# Altium PCB PCB2.PcbDoc
Units mm, origin at the board's own origin, x right, y up, seen from the top; angles counter-clockwise.
Board outline 40 x 40 mm, 2 copper layers (Top Layer, Bottom Layer), stack 1.571 mm thick; 8 components, 12 nets, 57 pads, 27 vias.
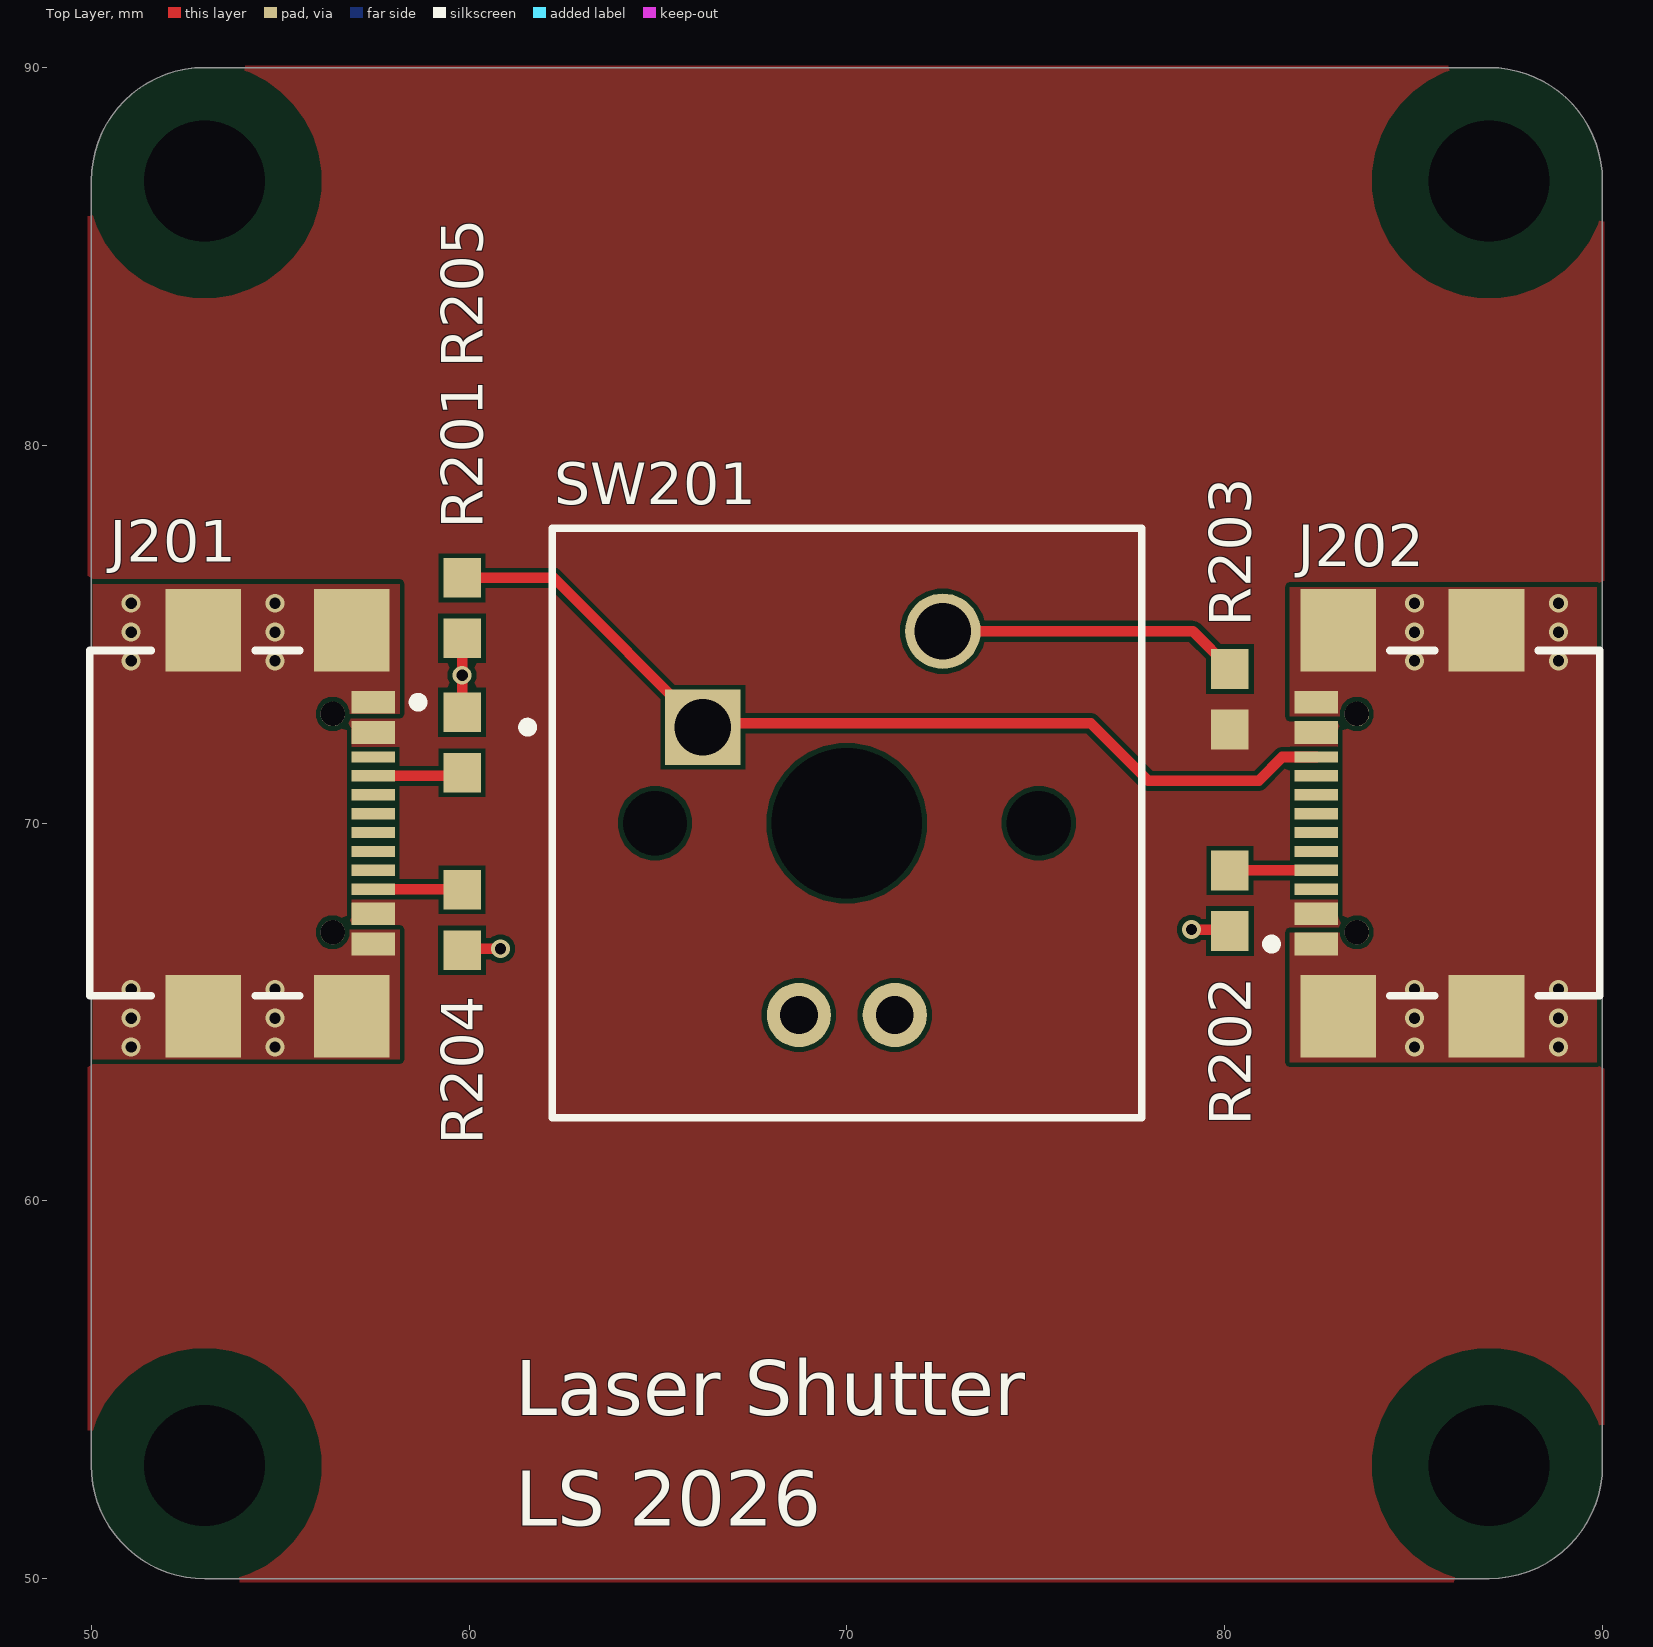
[diagram p0: Top Layer view]
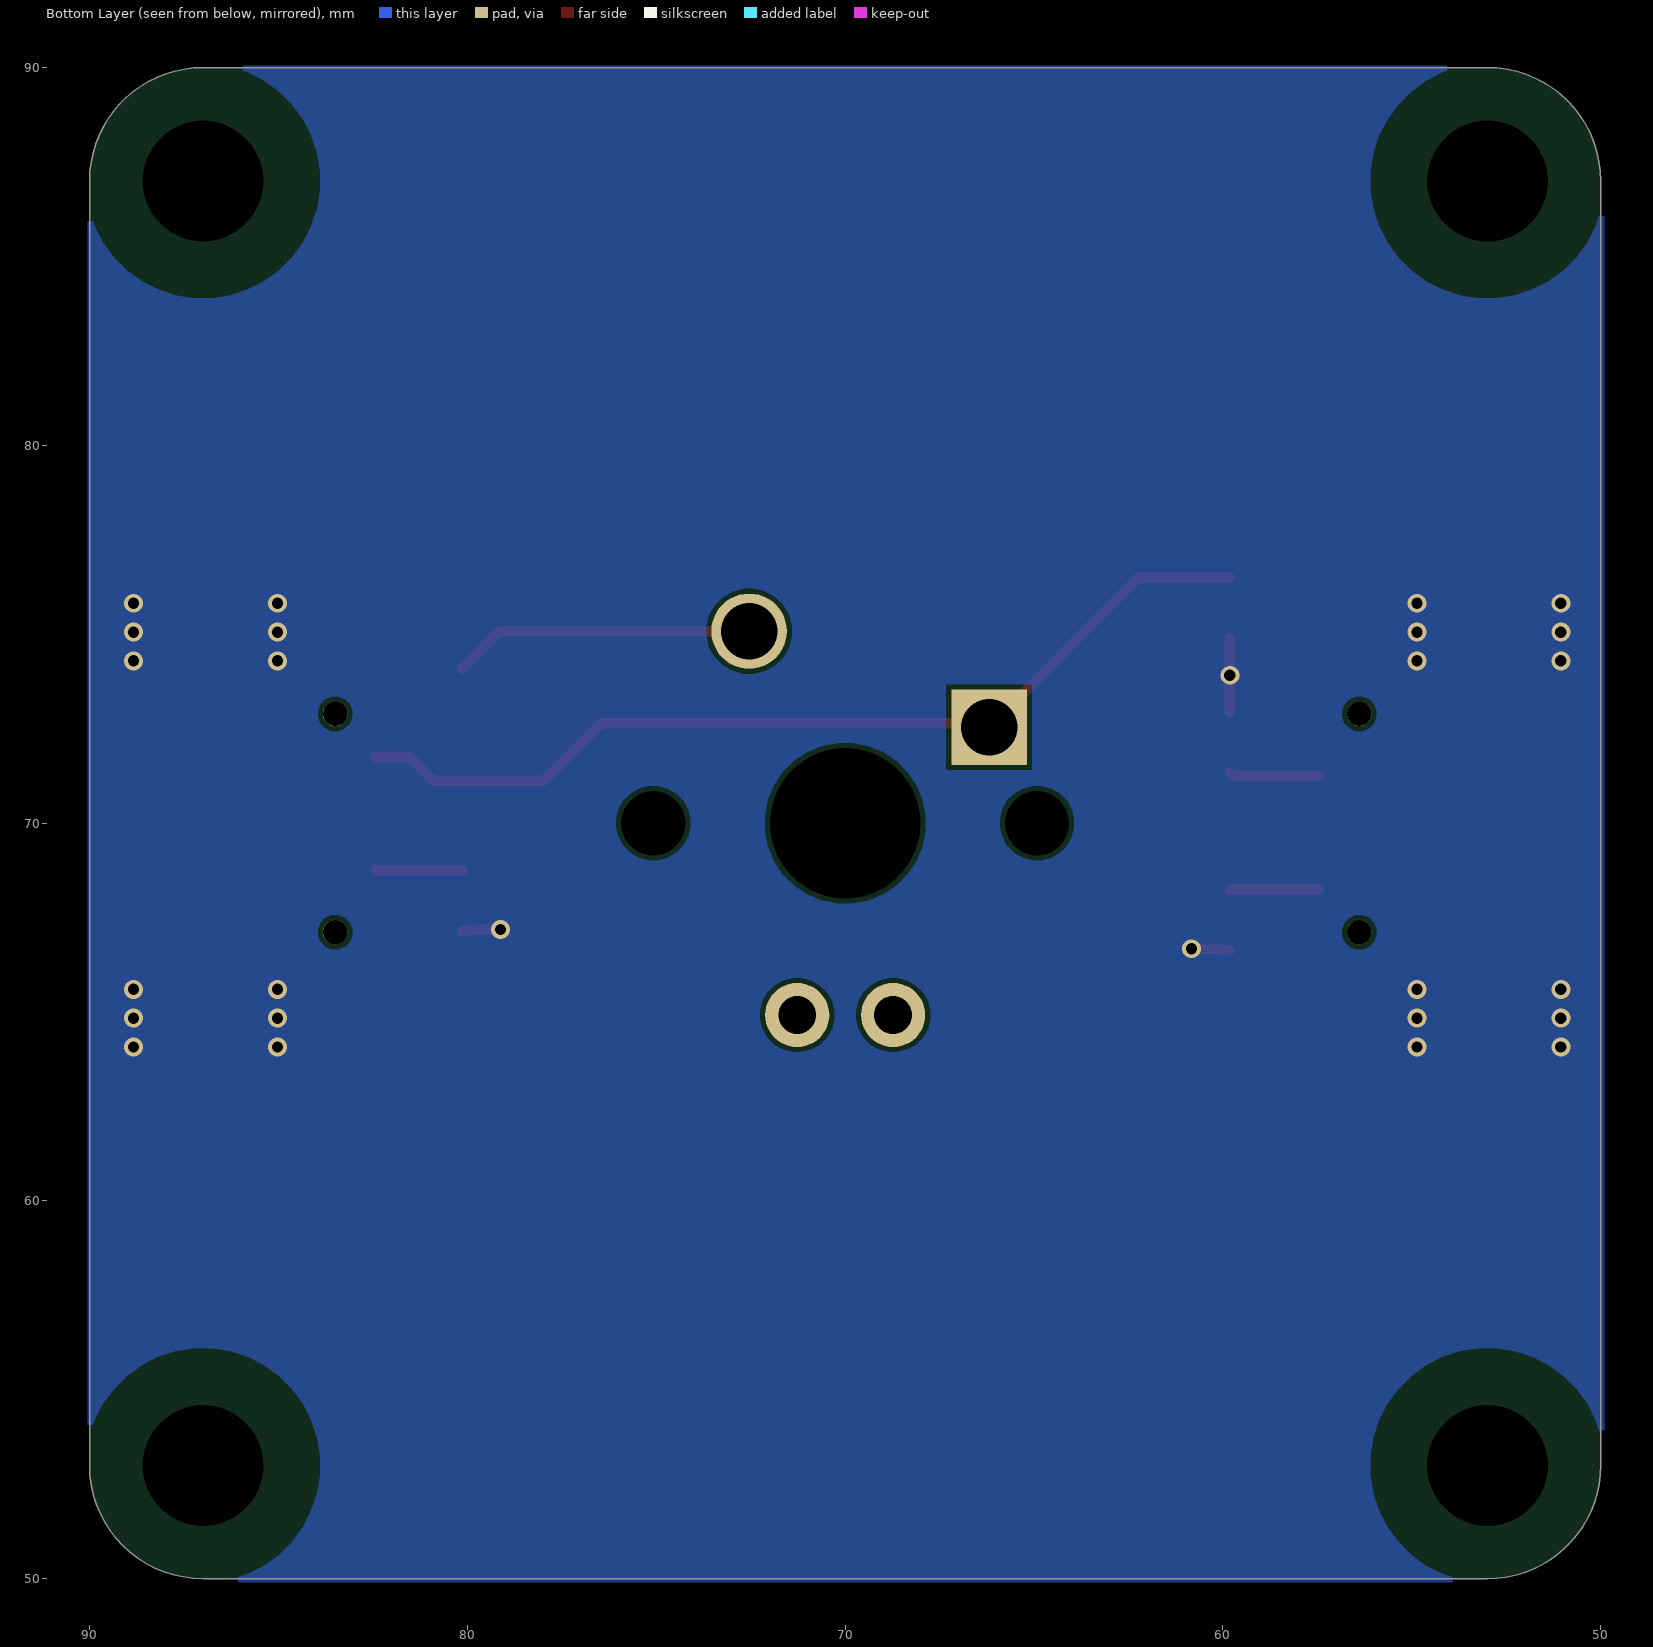
[diagram p1: Bottom Layer view, seen from below]
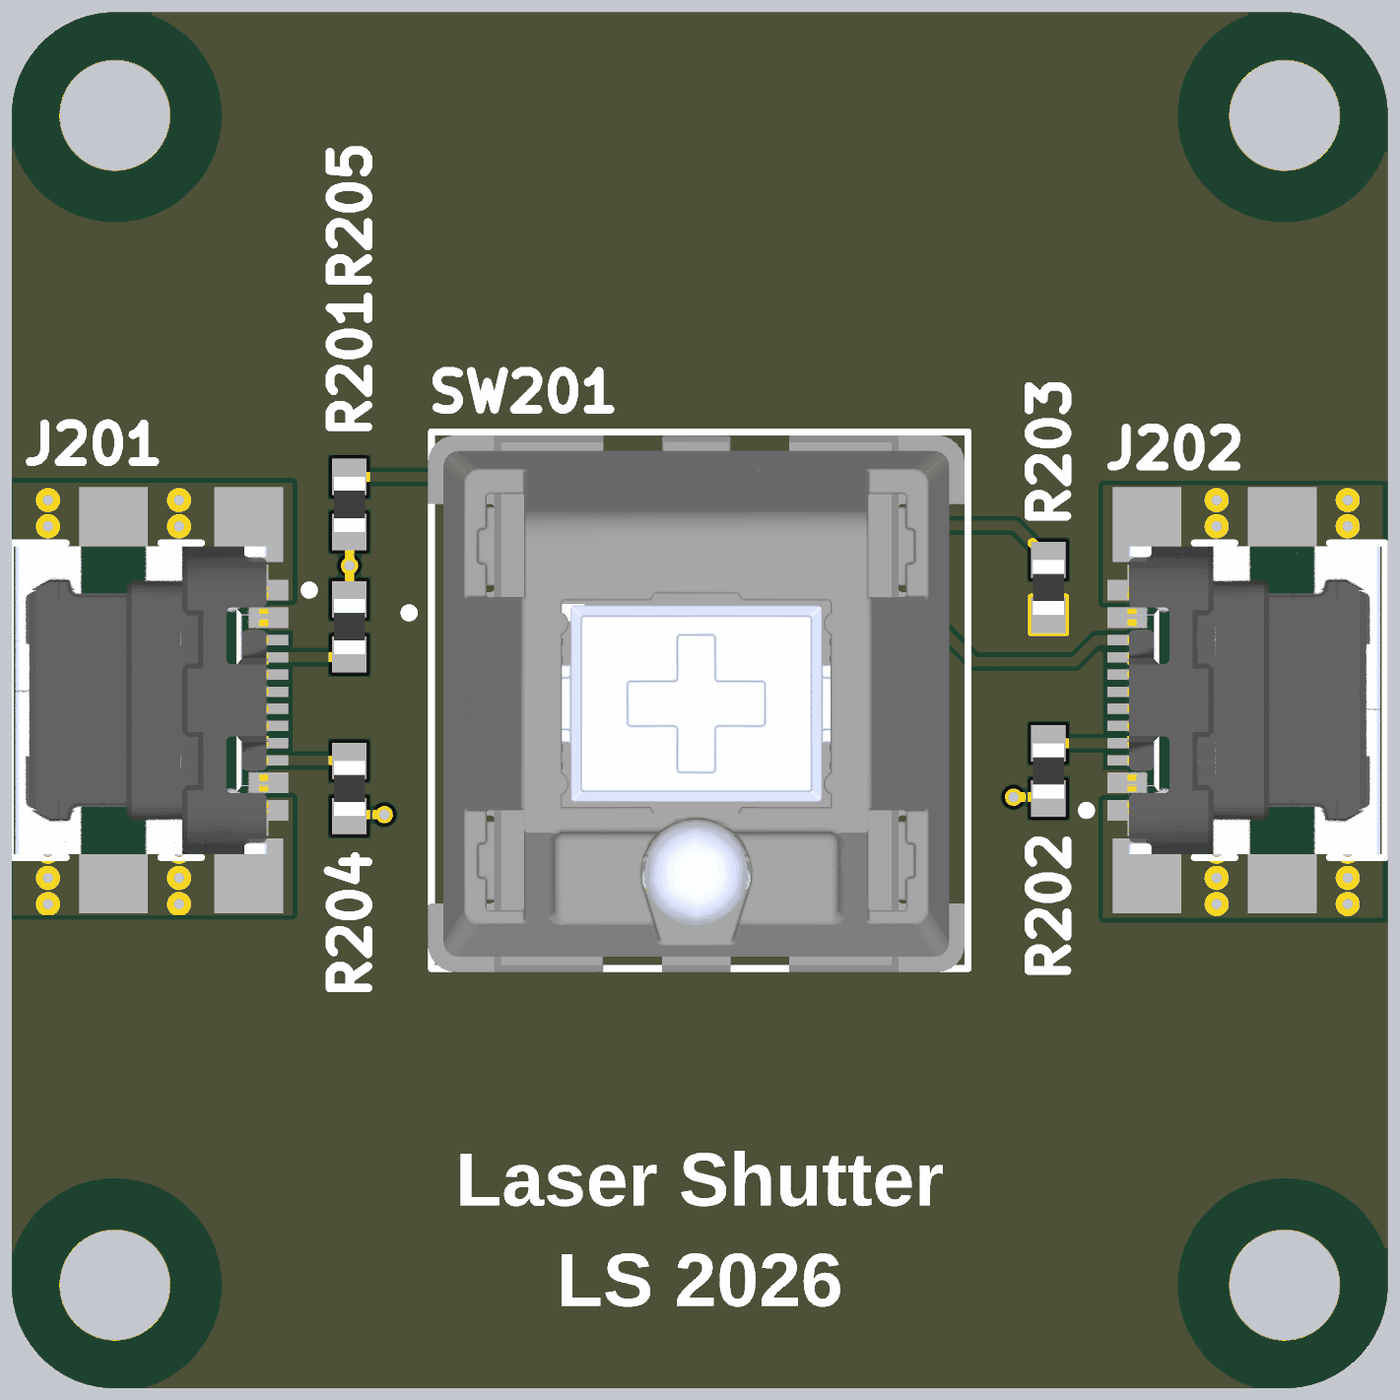
[diagram p2: 3D render of the assembled board from above, using the file's embedded part models]

## Layer stack, top to bottom
Top Solder: solder mask 0.0102, Solder Resist, Dk 3.5
Top Layer: signal copper 0.0356
Dielectric 1: dielectric 1.5, FR-4, Dk 4.8
Bottom Layer: signal copper 0.0356
Bottom Solder: solder mask 0.0102, Solder Resist, Dk 3.5

## Board outline
50,53 50,87 cw(c53,87) 53,90 87,90 cw(c87,87) 90,87 90,53 cw(c87,53) 87,50 53,50 cw(c53,53)

## Design rules (kind name [scope] priority, off if disabled: settings)
Clearance Clearance_MountingHole [All vs InUnion(2)] p1: gap=1.5 ignorepadtopadclearanceinfootprint=TRUE
Clearance [All] p2: gap=0.127 ignorepadtopadclearanceinfootprint=TRUE except(0.254: THPad-THPad THPad-Via Via-Via)
HoleSize [All] p1: absolutevalues=TRUE maxlimit=254 minlimit=0.025 maxpercent=80.000 minpercent=20.000
MinimumSolderMaskSliver [All] p1: minsoldermaskwidth=0
PolygonConnect [All] p1: connectstyle=Direct reliefconductorwidth=0.254 reliefentries=4 polygonreliefangle="90 Angle" airgapwidth=0.254
RoutingVias [All] p1: holewidth=0.3 width=0.5 viastyle="Through Hole" minholewidth=0.3 minwidth=0.5 maxholewidth=2539.975 maxwidth=2539.975
SilkToSilkClearance [All] p1: silktosilkclearance=0
SilkToSolderMaskClearance [IsPad] p1: minsilkscreentomaskgap=0 clearancetoexposedcopper=TRUE
SolderMaskExpansion SolderMaskExpansion_VIA [IsVia] p1: expansion=-100 istentingtop=FALSE
SolderMaskExpansion [All] p2: expansion=0.102 istentingtop=FALSE
SupplyNets "Schematic Supply Nets_5" [InNet('GND')] p1: voltage=0.000
SupplyNets "Schematic Supply Nets_1" [InNet('+5')] p2: voltage=0.000
Width [All] p1: maxlimit=254 minlimit=0.127 preferedwidth=0.254
26 further rules are at their usual default settings.

## Components (designator, comment, footprint, x,y, rotation, side; value= is the part's Value field where it differs from the comment)
J201 "USB4110-GF-A" FP-USB4110-GF-A-MFG 53.784,70 r270 top
J202 "USB4110-GF-A" FP-USB4110-GF-A-MFG 86.106,70 r90 top
R201 "5k1" RESC1608X06N 59.817,72.136 r270 top
R202 "5k1" RESC1608X06N 80.137,67.945 r90 top
R203 "100R" RESC1608X06N 80.137,73.279 r270 top
R204 "5k1" RESC1608X06N 59.817,67.437 r90 top
R205 "5k1" RESC1608X06N 59.817,75.692 r90 top
SW201 "Switch" CHRY-MX 70,70 r0 top

## Footprints (in the part's own frame and the unit in brackets; to place one, negate y for a bottom-side part, rotate by r counter-clockwise, add the part's x,y. Pads: shape width x height; smd on the part's side, far side on the other; paste and mask are expansions set on the pad)
CHRY-MX [mm] "THD, 2-Leads, Body 15.6x15.6mm"
  rect 2x2 hole 1.499 paste-2539.97: 1(-3.81,2.54)
  round 2 hole 1.499 paste-2539.97: 2(2.54,5.08)
  round 1.7 hole 1: 3(-1.27,-5.08) 4(1.27,-5.08)
  round 0 hole 3.988 unplated paste-2539.97: MH1(0,0)
  round 0 hole 1.702 unplated paste-2539.97: MH2(-5.08,0) MH3(5.08,0)
  silkscreen extent -8.57,-7.8 7.8,7.8, body extent -7.9,-7.9 7.7,7.7, height 15.4
FP-USB4110-GF-A-MFG [mm]
  rect 2.18x2 smd paste+0 mask+0: 1(-5.11,3.105) 2(5.11,3.105) 3(-5.11,-0.825) 4(5.11,-0.825)
  rect 0.6x1.15 smd paste+0 mask+0: A1-B12(-3.2,3.68) A4-B9(-2.4,3.68) B1-A12(3.2,3.68) B4-A9(2.4,3.68)
  rect 0.3x1.15 smd paste+0 mask+0: A5(-1.25,3.68) A6(-0.25,3.68) A7(0.25,3.68) A8(1.25,3.68) B5(1.75,3.68) B6(0.75,3.68) B7(-0.75,3.68) B8(-1.75,3.68)
  round 0.65 hole 0.65 unplated paste-2539.97 mask+0: ""(-2.89,2.605) ""(2.89,2.605)
  silkscreen extent -4.57,-3.83 4.57,4.99, body extent -6.3,-3.92 6.3,4.36, height 0.25
RESC1608X06N [mm] "Chip Resistor, 2-Leads, Body 1,55x0,85mm, IPC Medium Density"
  rect 1.05x1 smd: 1(-0.8,0) 2(0.8,0)
  body extent -0.8,-0.45 0.8,0.45, height 0.6

## Part data
J201 J202: library part CMP-245163-000002-1, "CONN USB 2.0 TYPE-C R/A SMT", Current Rating=3/4.25/1.25/0.25A, Manufacturer=GCT, Package=0, Temperature="-40°C to +85°C", Temperature Range High=+85°C, Temperature Range Low=-40°C, Voltage Rating=20V, Automotive=No, Category=Conn, ComponentLink2Description=Datasheet, ComponentLink2URL=https://gct.co/files/drawings/usb4110.pdf, Conn Orientation="Right Angle", Contact Material=Gold,Nickel, Device Class L1=Connectors, Device Class L2="USB Connectors", Device Class L3=unset, Digikey Description="CONN USB 2.0 TYPE-C R/A SMT", Height=3.46mm, Is Female=yes, Lead Free=Yes, Manufacturer Part Number=USB4110-GF-A, Number Of Contacts=16, Octopart=https://octopart.com/usb4110-gf-a-gct-103941985, RoHS=TRUE, Shielding=true, Standoff Height=0.1mm, Usb Standard="USB 2.0"
R201 R202 R203 R204 R205: library part R0603, "Resistor"
SW201: library part "Cherry MX", "Keylock Switch, 12 V, -10 to 70 degC, 2-Pin THD, RoHS, Bulk", Actuator Color=N/A, Illumination Color=N/R, Manufacturer=Cherry, Maximum AC Voltage Rating=12V, Maximum Contact Resistance=200mOhm, Maximum Current Rating=0.01A, Minimum Insulation Resistance=100MOhm, Operating Force=0.58N, Operating Temperature=-10to70C, Package Description="2-Pin Through Hole Device, Body 15.6 x 15.6 mm", Package Reference=MX1A-11NW, Part No=MX1A11NW, Actuator Length=3.6mm, Actuator Material=N/A, Actuator Style=Button, Body Orientation=Straight, Contact Material=Silver/Gold, Contact Plating=N/A, COO=UK, Datasheet URL=https://cdn.sparkfun.com/datasheets/Components/Switches/MX%20Series.pdf, Datasheet Version=09/2000, Dielectric Strength=N/A, Dimension=15.6x15.6x15.2mm, ECCN=EAR99, Electrical Life=50000000Cycle, Family=MX, Housing Material=N/A, HTS=8536509065, Illumination Type=N/R, IP Rating=N/A, Manufacturer URL=http://cherryswitches.com/cn/, Maximum DC Voltage Rating=12V, Maximum Power Rating=N/A, Mechanical Life=N/A, Mounting=ThroughHole, Mounting Technology=ThroughHole, Number of Terminals=2, Operating Speed=N/A, Packaging=N/A, Pole Throw Configuration=SPST, RoHS=Unknown, Row Spacing=6.35mm, Supplier=CherryElectrical, Switch Configuration=N.O., Terminal Pitch=2.54mm, Terminal Type=PCPins, Total Travel=4.06mm, Type=DesktopProfile

## Free pads (board coordinates)
  round 0 hole 3.2: 12(53,87) 13(87,87) 14(53,53) 15(87,53)

## Via types
v1: diameter 0.5, hole 0.3, Top Layer to Bottom Layer, 27 vias

## Nets (pads, with @x,y where several pads share a name; then routed paths per layer and width w, separated by ;. In a path a pad name is that pad's centre, name@x,y a point inside that pad or via, vN(x,y) a via of type N, cw(c..) or ccw(c..) an arc to the next point about the centre after c; other vN are vias at no path point)
+5: J201.A4-B9 J201.B4-A9 J202.A4-B9 J202.B4-A9 R203.2
CC1: J201.A5 R201.2 | length 2.4
  Top Layer w0.28: J201.A5 59.731,71.25 R201.2
CC2: J201.B5 R204.2 | length 2.4
  Top Layer w0.28: J201.B5 59.804,68.25 R204.2
GND: J201.1 J201.2 J201.3 J201.4 J201.A1-B12 J201.B1-A12 J202.1 J202.2 J202.3 J202.4 J202.A1-B12 J202.B1-A12 R201.1 R202.1 R204.1 R205.1 | length 4
  Top Layer w0.28: R204.1 60.177,66.675 v1(60.833,66.675) ; R201.1 R205.1 ; v1(79.121,67.183) 79.777,67.183 R202.1
  other v1: 51.054,64.075 54.864,64.075 85.026,64.075 88.836,64.075 51.054,64.837 54.864,64.837 85.026,64.837 88.836,64.837 51.054,65.599 54.864,65.599 85.026,65.599 88.836,65.599 59.817,73.914 51.054,74.295 54.864,74.295 85.026,74.295 88.836,74.295 51.054,75.057 54.864,75.057 85.026,75.057 88.836,75.057 51.054,75.819 54.864,75.819 85.026,75.819 88.836,75.819
NetDS101_1: 
NetJ202_A5: J202.A5 R202.2 | length 2.3
  Top Layer w0.28: R202.2 80.142,68.75 J202.A5
NetJ202_B5: J202.B5 R205.2 SW201.1 | length 25.2
  Top Layer w0.28: R205.2 62.238,76.492 SW201.1 66.294,72.644 76.454,72.644 77.978,71.12 80.899,71.12 81.529,71.75 J202.B5
NetP101_1: 
NetR105_2: 
NetR203_1: R203.1 SW201.2 | length 8
  Top Layer w0.28: SW201.2 79.161,75.08 80.137,74.104 R203.1
POS1: 
POS2: 
pads on no net: J201. J201.A6 J201.A7 J201.A8 J201.B6 J201.B7 J201.B8 J202. J202.A6 J202.A7 J202.A8 J202.B6 J202.B7 J202.B8 SW201.3 SW201.4 SW201.MH1 SW201.MH2 SW201.MH3

## Polygon pours and split planes (outlines as drawn)
GND on Top Layer "GND_L01_P000" (solid, pour order 0): 89.852,63.673 81.724,63.673 81.724,67.102 83.121,67.102 83.121,72.817 81.724,72.817 81.724,76.246 89.852,76.246
GND on Top Layer "GND_L01_P002" (solid, pour order 2): 50.038,76.327 58.166,76.327 58.166,72.898 56.769,72.898 56.769,67.183 58.166,67.183 58.166,63.754 50.038,63.754
+5 on Top Layer "+5_L01_P003" (solid, pour order 3): 53.213,90.043 52.197,89.916 51.054,89.408 50.292,88.392 49.911,87.122 49.911,52.705 50.165,51.689 50.673,50.927 51.689,50.165 52.832,49.911 87.122,49.911 88.392,50.165 89.281,50.927 89.916,51.943 90.043,52.832 90.043,87.249 89.789,88.265 89.154,89.154 88.265,89.789 87.249,90.043
GND on Bottom Layer "GND_L02_P004" (solid, pour order 4): 53.213,90.043 52.197,89.916 51.054,89.408 50.292,88.392 49.911,87.122 49.911,52.705 50.165,51.689 50.673,50.927 51.689,50.165 52.832,49.911 87.122,49.911 88.392,50.165 89.281,50.927 89.916,51.943 90.043,52.832 90.043,87.249 89.789,88.265 89.154,89.154 88.265,89.789 87.249,90.043

## Silkscreen, mask and mechanical layers (free items; w line width, h text height)
Top Overlay:
  text "Laser Shutter" at 61.225,53.848 h2.5
  text "LS 2026" at 61.225,50.927 h2.5
Mechanical 1:
  the board outline again, w0.2